# EAGLE board c (EAGLE 7.1.0)
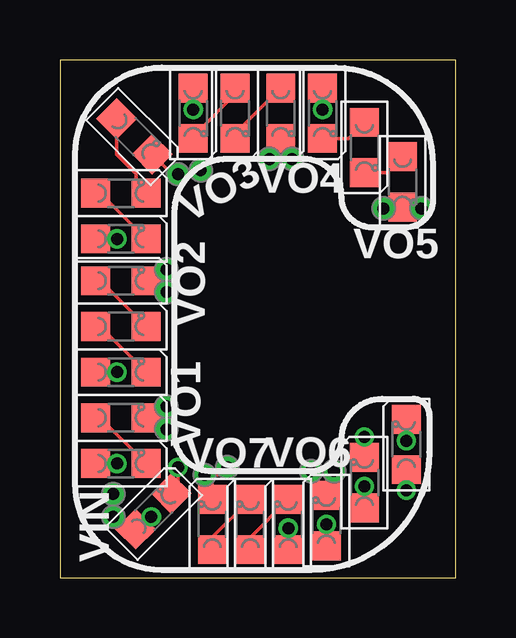
[diagram p0: board, top side]
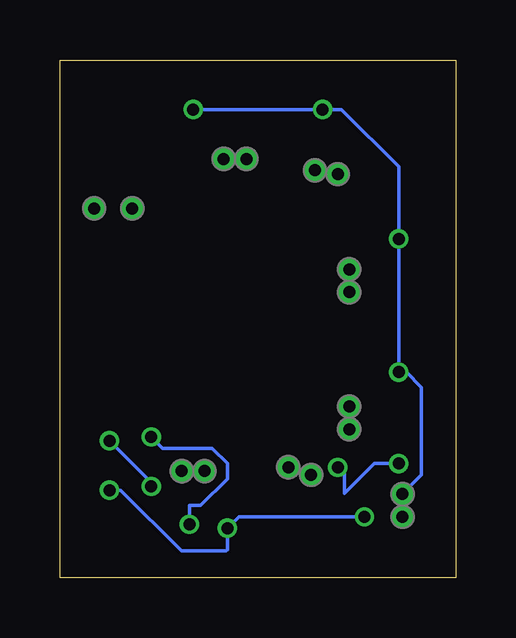
[diagram p1: board, bottom side, seen from below]

Size 16.51 x 21.59 mm. Coordinates in mm from the lower left corner, seen from the top.
Outline: 0,0 16.51,0 16.51,21.59 0,21.59 0,0
Copper layers (1*16): Top 0.035mm / dielectric 1.5mm / Bottom 0.035mm
Design rules "Fusion_eagle_rule_v1.1_tms *": minimum track width 6mil, minimum drill 12mil, track to track 6mil, track to pad 6mil, pad to pad 6mil, via to via 6mil, smd to smd 0mil, copper to edge 10mil, drill to drill 10mil, minimum pad ring 10mil, minimum via ring 6mil, stop-mask expansion 2mil, vias tented up to drill 100mil, thermal gap 10mil

## Footprints (pad centres in the part's own frame; a part is rotated, then mirrored left to right if it is on the bottom)
LED_0805 = smd 1.2 x 1.2: A 0,-1.05; C 0,1.05
P1-20 = drill 0.5: TP 0,0

## Placement (x,y rotation side)
LED1  [LED_0805]  3.9,2.76 315 top
LED2  [LED_0805]  2.54,4.76 270 top
LED3  [LED_0805]  2.54,6.67 270 top
LED4  [LED_0805]  2.54,8.57 270 top
LED5  [LED_0805]  2.54,10.48 270 top
LED6  [LED_0805]  2.54,12.38 270 top
LED7  [LED_0805]  2.54,14.13 270 top
LED8  [LED_0805]  2.54,16.03 270 top
LED9  [LED_0805]  3.11,18.4 225 top
LED10  [LED_0805]  5.56,19.37 180 top
LED11  [LED_0805]  7.3,19.37 180 top
LED12  [LED_0805]  9.21,19.37 180 top
LED13  [LED_0805]  10.95,19.37 180 top
LED14  [LED_0805]  12.7,17.94 180 top
LED15  [LED_0805]  14.29,16.51 180 top
LED16  [LED_0805]  14.45,5.56 0 top
LED17  [LED_0805]  12.7,3.97 0 top
LED18  [LED_0805]  11.11,2.38 0 top
LED19  [LED_0805]  9.52,2.22 0 top
LED20  [LED_0805]  7.94,2.22 0 top
LED21  [LED_0805]  6.35,2.22 0 top
VIN  [P1-20]  2.22,2.54 0 top
VIN1  [P1-20]  2.22,3.49 0 top
VO1  [P1-20]  4.45,7.14 0 top
VO2  [P1-20]  4.45,11.91 0 top
VO3  [P1-20]  5.87,16.99 0 top
VO4  [P1-20]  9.68,17.46 0 top
VO5  [P1-20]  13.49,15.4 0 top
VO6  [P1-20]  11.43,4.45 0 top
VO7  [P1-20]  6.99,4.6 0 top
VO8  [P1-20]  4.45,6.19 0 top
VO9  [P1-20]  4.45,12.86 0 top
VO10  [P1-20]  4.92,16.83 0 top
VO11  [P1-20]  8.73,17.46 0 top
VO12  [P1-20]  15.08,15.4 0 top
VO13  [P1-20]  10.48,4.45 0 top
VO14  [P1-20]  6.03,4.29 0 top

## Library data of the parts
LED1-LED21 VIN VIN1 VO1-VO14 = CyberRailGuru

## Nets
N$3: LED2.C LED3.A
N$4: LED1.C LED2.A
N$7: LED5.C LED6.A
N$8: LED4.C LED5.A
N$11: LED8.C LED9.A
N$12: LED7.C LED8.A
N$15: LED11.C LED12.A
N$16: LED10.C LED11.A
N$19: LED14.C LED15.A
N$20: LED13.C LED14.A
N$23: LED17.C LED18.A
N$24: LED16.C LED17.A
N$27: LED20.C LED21.A
N$28: LED19.C LED20.A
VIN: LED1.A LED4.A LED7.A LED10.A LED13.A LED16.A LED19.A VIN1.TP VIN.TP
VOUT1: LED3.C VO1.TP VO8.TP
VOUT2: LED6.C VO2.TP VO9.TP
VOUT3: LED9.C VO3.TP VO10.TP
VOUT4: LED12.C VO4.TP VO11.TP
VOUT5: LED15.C VO5.TP VO12.TP
VOUT6: LED18.C VO6.TP VO13.TP
VOUT7: LED21.C VO7.TP VO14.TP

## Tracks (layer width: path | path; a pad name or v marks a point on that pad's centre or on a via)
N$3
  Top 0.152: LED3.A 1.69,6.67 LED2.C
N$4  (via drill 0.5)
  Top 0.152: LED2.A v2.38,4.76 | v4.92,4.6 4.92,3.78 LED1.C
  Bottom 0.152: v2.38,4.76 3.39,4.76 LED1.C 4.64,4.33 v4.92,4.6
N$7
  Top 0.152: LED6.A 1.69,12.38 LED5.C
N$8
  Top 0.152: LED5.A 1.69,10.48 LED4.C
N$11
  Top 0.152: LED9.A 2.37,17.64 3.17,16.83 3.17,16.45 LED8.C
N$12
  Top 0.152: LED8.A 1.69,16.03 LED7.C
N$15
  Top 0.152: LED11.C 7.3,18.51 LED12.A
N$16
  Top 0.152: LED10.C 5.56,18.67 5.81,18.67 7.3,20.16 LED11.A
N$19
  Top 0.152: LED14.C 13.62,16.89 LED15.A
N$20
  Top 0.152: LED13.C 12.03,18.32 LED14.A
N$23  (via drill 0.5)
  Top 0.152: LED18.A v11.11,2.22 | v12.7,5.87 LED17.C
  Bottom 0.152: v11.11,2.22 11.11,3.02 10.64,3.02 9.53,4.13 9.53,4.76 10.16,5.4 12.22,5.4 v12.7,5.87
N$24  (via drill 0.5)
  Top 0.152: LED16.C v14.45,5.71 | v12.7,3.81 LED17.A
  Bottom 0.152: v12.7,3.81 12.7,3.97 v14.45,5.71
N$27
  Top 0.152: LED21.A 6.35,1.69 LED20.C
N$28
  Top 0.152: LED20.A 7.94,1.69 LED19.C
VIN  (via drill 0.5)
  Top 0.152: VIN1.TP VIN.TP 2.64,2.54 LED1.A 3.29,2.02 v3.81,2.54 | LED16.A v14.45,3.65 | v9.53,2.06 LED19.A | LED4.A v2.38,8.57 | LED7.A v2.38,14.13 | LED10.A v5.56,19.53 | LED13.A v10.95,19.53
  Bottom 0.152: v14.45,3.65 13.97,3.65 11.43,1.11 9.58,1.11 LED19.A v9.52,2.06 v9.53,2.06 9.05,2.54 v3.81,2.54 | VIN1.TP 1.43,4.29 1.43,7.94 2.06,8.57 v2.38,8.57 v2.38,14.13 2.38,17.14 4.76,19.53 v5.56,19.53 v10.95,19.53
VOUT1
  Top 0.152: VO1.TP 4.07,7.14 LED3.C 4.07,6.19 VO8.TP
VOUT2
  Top 0.152: VO2.TP 4.07,11.91 LED6.C 4.07,12.86 VO9.TP
VOUT3
  Top 0.152: LED9.C 4.68,16.83 VO10.TP 5.71,16.83 VO3.TP
VOUT4
  Top 0.152: VO11.TP 8.73,17.84 LED12.C 9.68,17.84 VO4.TP
VOUT5
  Top 0.152: VO5.TP 14.23,15.4 LED15.C 14.35,15.4 VO12.TP
VOUT6
  Top 0.152: VO13.TP 10.48,4.07 LED18.C 11.43,3.75 VO6.TP
VOUT7
  Top 0.152: LED21.C 6.35,3.97 VO14.TP 6.67,4.29 VO7.TP

## Text on the board
201bmp: C